# EAGLE board Adafruit Metro ESP32-S3 Rev A (EAGLE 9.6.2)
REV: A
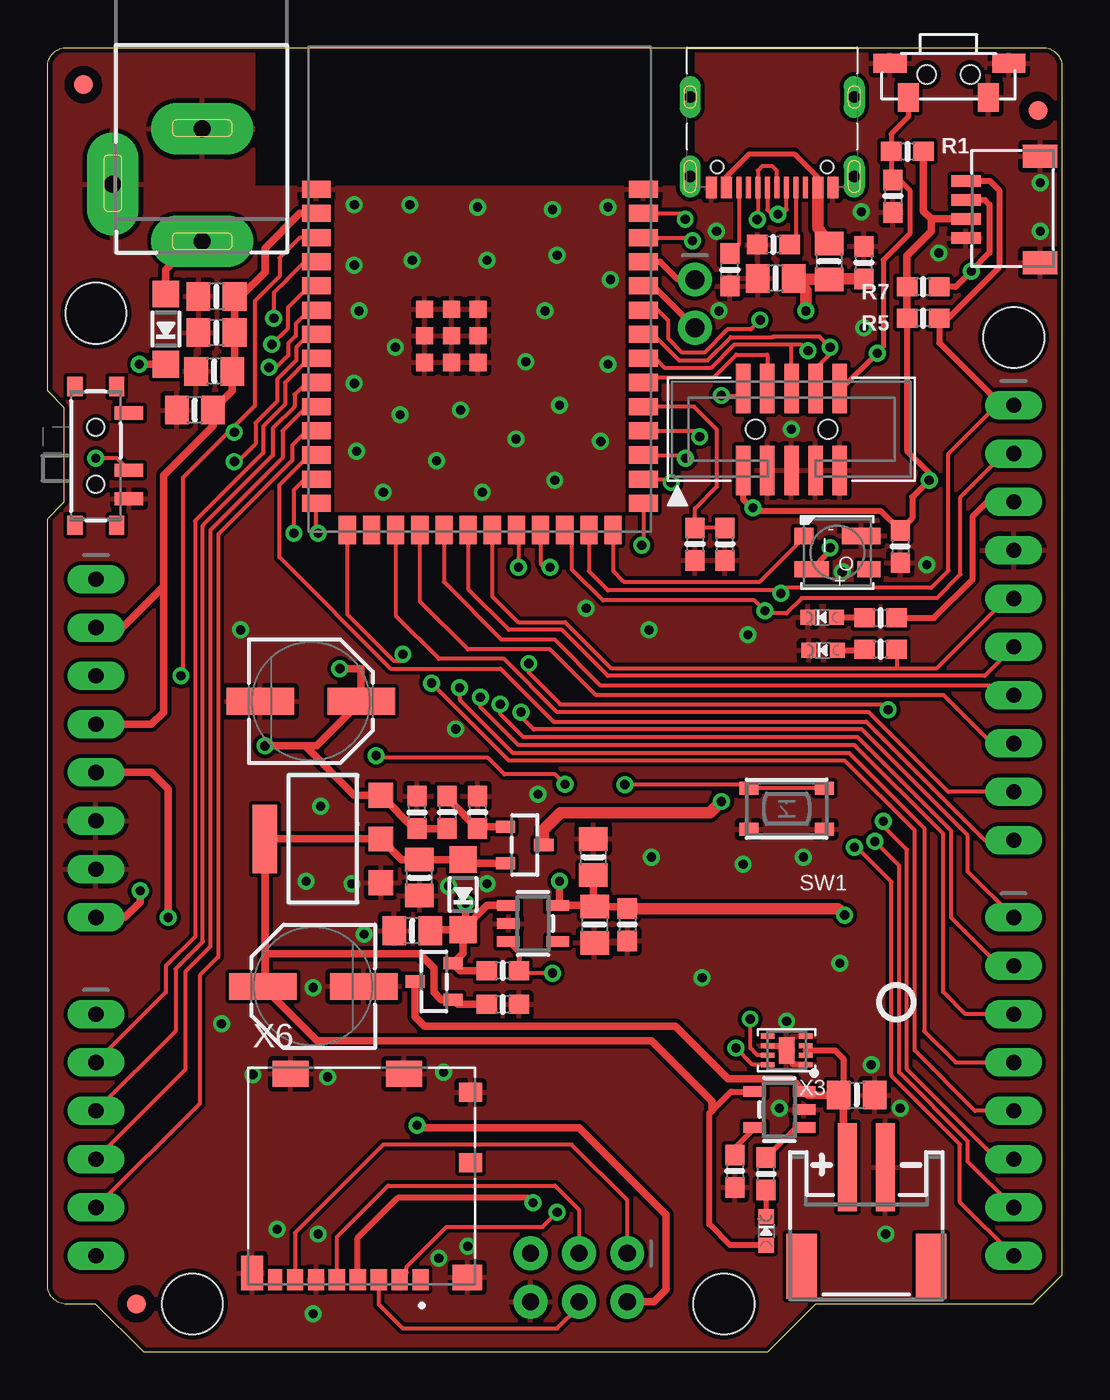
[diagram p0: board, top side]
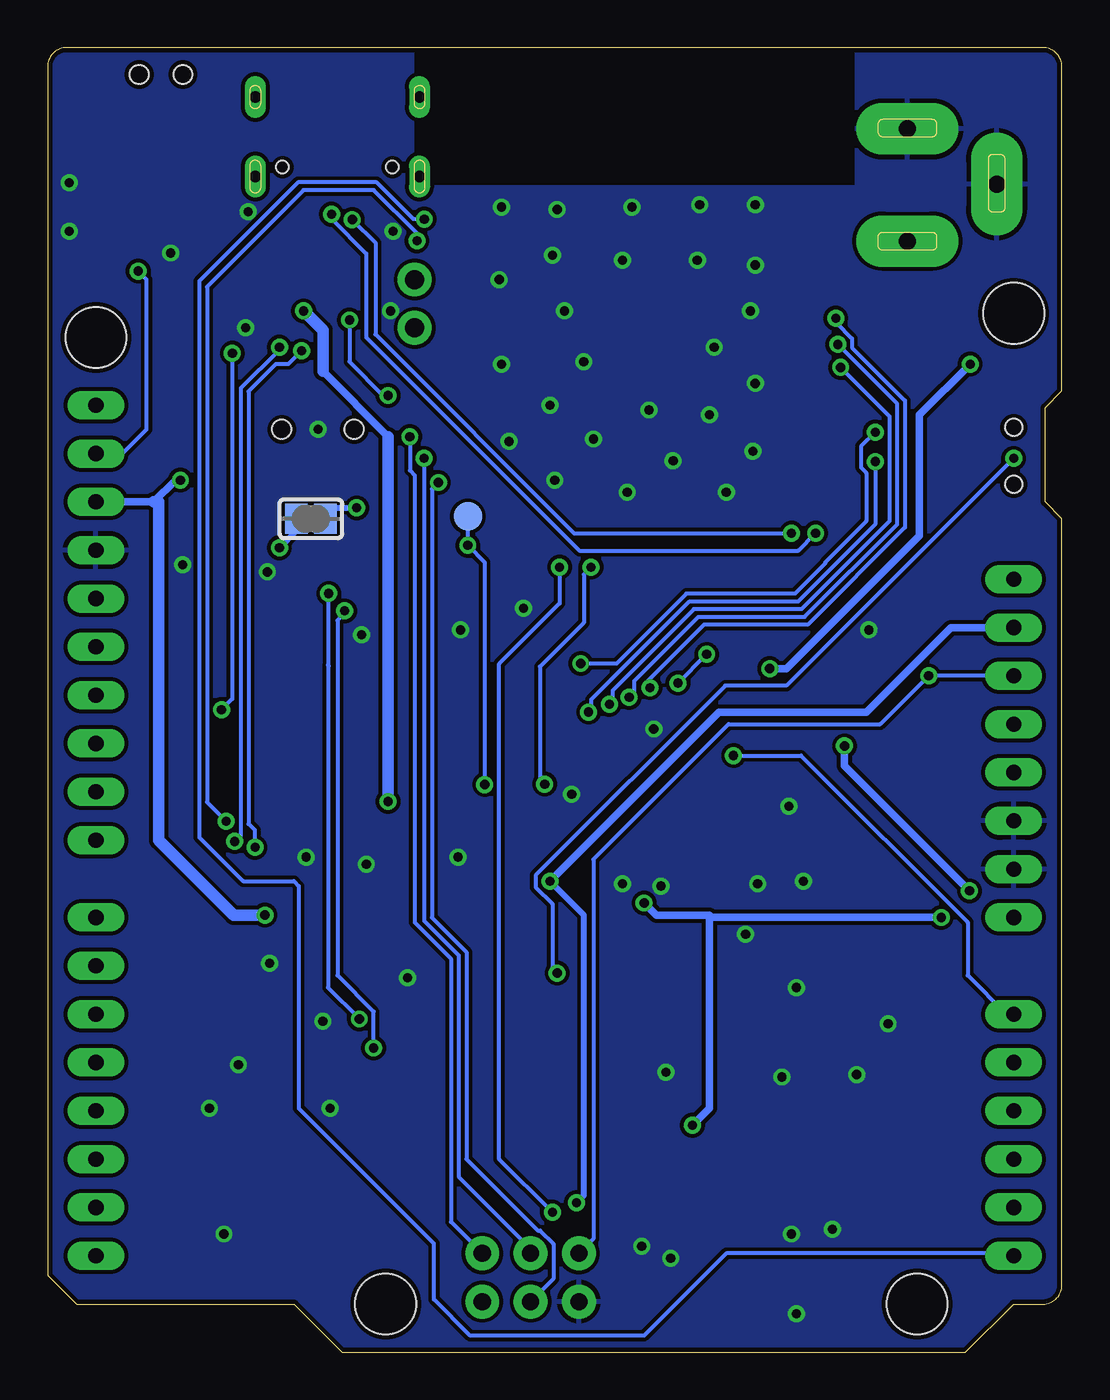
[diagram p1: board, bottom side, seen from below]

Size 53.34 x 68.58 mm. Coordinates in mm from the lower left corner, seen from the top.
Outline: 53.34,4.06 51.82,2.54 40.39,2.54 37.85,0 5.08,0 2.54,2.54 1,2.54 arc-90 0,3.54 0,43.81 0.89,44.7 0.89,49.66 0,50.55 0,67.58 arc-90 1,68.58 52.34,68.58 arc-90 53.34,67.58 53.34,4.06
Copper layers (1*16): Top 0.035mm / dielectric 1.5mm / Bottom 0.035mm
Design rules "adafruit *": minimum track width 8mil, minimum drill 15.5mil, track to track 8mil, track to pad 8mil, pad to pad 8mil, via to via 8mil, smd to smd 8mil, copper to edge 10mil, drill to drill 8mil, minimum pad ring 10mil, minimum via ring 8mil, stop-mask expansion 2mil, vias tented up to drill 20mil, thermal gap 10mil
Net classes: 2 lowpower: width 0.305 mm, drill 0.483 mm; 3 Power: width 0.305 mm, drill 0.483 mm
Holes 3.2 mm at 35.56,2.54 7.62,2.54 50.8,53.34 2.54,54.61

## Footprints (pad centres in the part's own frame; a part is rotated, then mirrored left to right if it is on the bottom)
1X06_OVALWAVE = drill 0.8 pad 1.5 long: 1 -6.35,0; 2 -3.81,0; 3 -1.27,0; 4 1.27,0; 5 3.81,0; 6 6.35,0
0805-NO = smd 1.24 x 1.5: 1 -0.95,0; 2 0.95,0
0603-NO = smd 1.075 x 1: 1 -0.85,0; 2 0.85,0
CHIPLED_0603_NOOUTLINE = smd 0.8 x 0.8: A 0,-0.75; C 0,0.75
JST_SH4 = smd 0.6 x 1.55: 1 -1.5,2.006; 2 -0.5,2.006; 3 0.5,2.006; 4 1.5,2.006 | smd 1.2 x 1.8: MT1 -2.8,-1.894; MT2 2.8,-1.894
SOD-123 = smd 1.4 x 1.4: A 1.85,0; C -1.85,0
FIDUCIAL_1MM = smd 1 x 1: 1 0,0
2X03_ROUND_70MIL = drill 0.9 pad 1.778: 1 -2.54,-1.27; 2 -2.54,1.27; 3 0,-1.27; 4 0,1.27; 5 2.54,-1.27; 6 2.54,1.27
1X10_OVALWAVE = drill 0.8 pad 1.5 long: 1 -11.43,0; 2 -8.89,0; 3 -6.35,0; 4 -3.81,0; 5 -1.27,0; 6 1.27,0; 7 3.81,0; 8 6.35,0; 9 8.89,0; 10 11.43,0
1X08_OVALWAVE = drill 0.8 pad 1.5 long: 1 -8.89,0; 2 -6.35,0; 3 -3.81,0; 4 -1.27,0; 5 1.27,0; 6 3.81,0; 7 6.35,0; 8 8.89,0
1X02_ROUND = drill 1 pad 1.778: 1 -1.27,0; 2 1.27,0
LED3535_FULLPADS = smd 1 x 0.85: 1 -1.75,0.875 | smd 1.8 x 0.85: 2 -1.35,-0.875 | smd 1.2 x 0.85: 3 1.65,-0.875 | smd 2 x 0.85: 4 1.25,0.875
PANASONIC_D = smd 3.556 x 1.4: + 2.654,0; - -2.654,0
SOT23-R = smd 0.635 x 1.016: 1 -0.95,-1; 2 0.95,-1; 3 0,1
SOLDERJUMPER_CLOSEDWIRE = smd 1.168 x 1.6: 1 -0.762,0; 2 0.762,0 | smd 0.635 x 0.203: WIRE 0,0
BTN_RKB2_4.6X2.8 = smd 1 x 0.7: A 1.973,1.075; A' -1.973,1.075; B 1.973,-1.075; B' -1.973,-1.075
SPST_TACTILE_RA = smd 1.1 x 1.5: 1 2.1,-0.9; 2 -2.1,-0.9 | smd 1.75 x 1: MT1 3.175,0.9; MT2 -3.075,0.9 | hole 1: 1.15,0.3; -1.15,0.3
SPDT_SMT_SSSS811101 = smd 0.7 x 1.5: A -2.25,1.242; B 0.75,1.242; C 2.25,1.242 | smd 1 x 0.8: SUP1 -3.65,0.592; SUP2 -3.65,-1.608; SUP3 3.65,0.592; SUP4 3.65,-1.608 | hole 0.9: -1.5,-0.508; 1.5,-0.508
TESTPOINT_ROUND_1.5MM_NO = smd 1.5 x 1.5: P$1 0,0
SOT223-R = smd 1.3 x 1.3: 1 -2.3,-3.05; 2 0,-3.05; 3 2.3,-3.05 | smd 3.6 x 1.3: 4 0,3.05
SOT23-5 = smd 0.55 x 1.2: 1 -0.95,-1.3; 2 0,-1.3; 3 0.95,-1.3; 4 0.95,1.3; 5 -0.95,1.3
S3-WROOM32 = smd 1.5 x 0.9: 1 -8.6,9.064; 2 -8.6,7.794; 3 -8.6,6.524; 4 -8.6,5.254; 5 -8.6,3.984; 6 -8.6,2.714; 7 -8.6,1.444; 8 -8.6,0.174; 9 -8.6,-1.096; 10 -8.6,-2.366; 11 -8.6,-3.636; 12 -8.6,-4.906; 13 -8.6,-6.176; 14 -8.6,-7.446; 27 8.6,-7.446; 28 8.6,-6.176; 29 8.6,-4.906; 30 8.6,-3.636; 31 8.6,-2.366; 32 8.6,-1.096; 33 8.6,0.174; 34 8.6,1.444; 35 8.6,2.714; 36 8.6,3.984; 37 8.6,5.254; 38 8.6,6.524; 39 8.6,7.794; 40 8.6,9.064 | smd 0.9 x 1.5: 15 -6.97,-8.836; 16 -5.7,-8.836; 17 -4.43,-8.836; 18 -3.16,-8.836; 19 -1.89,-8.836; 20 -0.62,-8.836; 21 0.65,-8.836; 22 1.92,-8.836; 23 3.19,-8.836; 24 4.46,-8.836; 25 5.73,-8.836; 26 7,-8.836 | smd 0.9 x 0.9: P$2 -2.9,2.76; P$3 -2.9,1.36; P$4 -2.9,-0.04; P$5 -1.5,-0.04; P$6 -1.5,1.36; P$7 -1.5,2.76; P$8 -0.1,2.76; P$9 -0.1,1.36; P$10 -0.1,-0.04
JSTPH2_BATT = smd 1 x 4.6: 1 -1,-2.303; 2 1,-2.303 | smd 1.6 x 3.4: NC1 -3.4,2.897; NC2 3.4,2.897
2X05_1.27MM_BOX_POSTS = smd 0.76 x 2.6: 1 -2.54,-2.15; 2 -2.54,2.15; 3 -1.27,-2.15; 4 -1.27,2.15; 5 0,-2.15; 6 0,2.15; 7 1.27,-2.15; 8 1.27,2.15; 9 2.54,-2.15; 10 2.54,2.15 | hole 1: -1.905,0; 1.905,0
TDFN8_2X2MM = smd 0.7 x 0.275: 1 -1,0.75; 2 -1,0.25; 3 -1,-0.25; 4 -1,-0.75; 5 1,-0.75; 6 1,-0.25; 7 1,0.25; 8 1,0.75 | smd 0.8 x 1.38: THERMAL 0,0
USB_C_CUSB31-CFM2AX-01-X = smd 0.575 x 1.15: A1B12 -3.2,2.275; A4B9 -2.4,2.275; B1A12 3.2,2.275; B4A9 2.4,2.275 | smd 0.275 x 1.15: A5 -1.25,2.275; A6 -0.25,2.275; A7 0.25,2.275; A8 1.25,2.275; B5 1.75,2.275; B6 0.75,2.275; B7 -0.75,2.275; B8 -1.75,2.275 | drill 0.6 pad 1 long: M1 -4.32,1.7; M2 4.32,1.7; M3 -4.32,-2.48; M4 4.32,-2.48 | hole 0.65: 2.89,1.2; -2.89,1.2
DCJACK_2MM_PTH = drill 0.9 pad 2.7 long: GND -2.9,2.54; GNDBREAK 0,-2.16; PWR 3,2.54
MOLEX_104031-0811 = smd 0.85 x 1.1: 1 3.105,-5.45; 2 2.005,-5.45; 3 0.905,-5.45; 4 -0.195,-5.45; 5 -1.295,-5.45; 6 -2.395,-5.45; 7 -3.495,-5.45 | smd 0.75 x 1.1: 8 -4.545,-5.45 | smd 1.2 x 1: 9 5.74,0.7; 10 5.74,4.4 | smd 1.55 x 1.35: G1 5.565,-5.325 | smd 1.17 x 1.8: G2 -5.755,-5.1 | smd 1.9 x 1.35: G3 -3.73,5.375; G4 2.24,5.375

## Placement (x,y rotation side)
AD  1x6 F  [1X06_OVALWAVE]  2.54,11.43 270 top
C1  10uF  [0805-NO]  38.29,56.45 180 top
C2  0.1uF  [0603-NO]  44.83,42.35 270 top
C3  10uF  [0805-NO]  19.56,24.96 90 top
C4  10uF  [0805-NO]  28.7,26.04 90 top
C5  1uF  [0603-NO]  30.48,22.48 270 top
C6  1uF  [0603-NO]  34.04,42.48 270 top
C7  10uF  [0805-NO]  8.89,55.5 180 top
C8  10uF  [0805-NO]  42.55,13.53 0 top
C10  10uF  [0805-NO]  8.89,53.59 180 top
C11  10uF  [0805-NO]  19.18,22.16 180 top
C12  0.1uF  [0603-NO]  19.43,28.38 90 top
C13  10uF  [0805-NO]  28.77,22.48 270 top
C14  1uF  [0603-NO]  44.45,60.77 270 top
C15  0.1uF  [0603-NO]  42.93,57.28 90 top
C17  10uF  [0805-NO]  8.76,51.56 180 top
C18  10uF  [0805-NO]  7.75,49.53 180 top
CHG1  ORANGE  [CHIPLED_0603_NOOUTLINE]  37.78,6.39 0 top
CONN1  STEMMA_I2C_QT  [JST_SH4]  50.29,60.07 90 top
D1  MBR540  [SOD-123]  6.22,53.78 90 top
D4  MBR540  [SOD-123]  21.84,24.07 90 top
F2  500mA  [0805-NO]  41.08,57.34 270 top
FD1  FIDUCIAL_1MM  [FIDUCIAL_1MM]  52.07,65.28 270 top
FD2  FIDUCIAL_1MM  [FIDUCIAL_1MM]  4.68,2.55 270 top
FD3  FIDUCIAL_1MM  [FIDUCIAL_1MM]  1.89,66.63 270 top
ICSP  3x2 M  [2X03_ROUND_70MIL]  27.94,3.94 180 top
IOH  1x10 F  [1X10_OVALWAVE]  50.8,38.35 270 top
IOL  1x8 F  [1X08_OVALWAVE]  50.8,13.97 270 top
JP2  UART  [1X02_ROUND]  34.04,55.12 270 top
L  RED  [CHIPLED_0603_NOOUTLINE]  40.78,36.91 90 top
LED1  WS2812B_3535FULL  [LED3535_FULLPADS]  41.53,42.04 0 top
ON  GREEN  [CHIPLED_0603_NOOUTLINE]  40.73,38.63 90 top
PC1  47uF/25V  [PANASONIC_D]  13.84,34.23 0 top
PC2  47uF/25V  [PANASONIC_D]  13.97,19.24 180 top
POWER  1x8 F  [1X08_OVALWAVE]  2.54,31.75 270 top
Q1  DMG3415U-7  [SOT23-R]  20.32,19.49 90 top
Q2  DMG3415U-7  [SOT23-R]  25.08,26.67 270 top
R1  10K  [0603-NO]  45.21,63.12 0 top
R2  10K  [0603-NO]  37.78,9.39 90 top
R3  5.1K  [0603-NO]  35.88,56.9 90 top
R4  2.2K  [0603-NO]  36.13,9.52 270 top
R5  10K  [0603-NO]  46.04,54.36 180 top
R6  10K  [0603-NO]  43.8,38.61 0 top
R7  10K  [0603-NO]  46.04,56.01 180 top
R8  5.1K  [0603-NO]  38.16,58.23 0 top
R9  10K  [0603-NO]  43.8,36.96 0 top
R12  100K  [0603-NO]  23.94,20.07 180 top
R14  100K  [0603-NO]  23.94,18.29 180 top
R15  100K  [0603-NO]  21.02,28.38 270 top
R16  100K  [0603-NO]  22.61,28.38 270 top
R17  1Meg  [0603-NO]  35.62,42.48 90 top
SJ1  [SOLDERJUMPER_CLOSEDWIRE]  39.5,43.81 0 bottom
SW1  RKB2  [BTN_RKB2_4.6X2.8]  38.86,28.58 180 top
SW3  RA_TACT  [SPST_TACTILE_RA]  47.37,66.87 0 top
SW4  SPDT R/A  [SPDT_SMT_SSSS811101]  3.05,47.12 270 top
TP1  [TESTPOINT_ROUND_1.5MM_NO]  31.24,43.94 0 bottom
U1  NCP1117ST50T3G  [SOT223-R]  14.48,26.99 90 top
U2  MCP73831T-2ACI/OT  [SOT23-5]  38.48,12.76 90 top
U4  AP2112(3.3V)  [SOT23-5]  25.53,22.54 270 top
U5  ESP32-S3-WROOM  [S3-WROOM32]  22.73,52.07 0 top
U$15  [PCBFEAT-REV-040]  44.64,18.42 0 top
U$52  [METROS3_TOP]  0,-0.13 0 top
U$58  [METROS3_BOT]  53.34,-0.13 0 bottom
X1  JSTPH  [JSTPH2_BATT]  43.05,7.43 180 top
X2  2x5 0.05in  [2X05_1.27MM_BOX_POSTS]  39.12,48.51 0 top
X3  MAX17048/T  [TDFN8_2X2MM]  38.86,15.87 180 top
X4  USB C  [USB_C_CUSB31-CFM2AX-01-X]  38.1,63.5 180 top
X5  2.1mm  [DCJACK_2MM_PTH]  5.59,61.4 270 top
X6  MicroSD  [MOLEX_104031-0811]  16.51,9.27 0 top

## Library data of the parts
AD ICSP IOH IOL POWER = microbuilder; FORCETHM: 1
C1-C8 C10-C15 C17 C18 D1 D4 F2 JP2 LED1 R1-R9 R12 R14-R17 SJ1 TP1 U$15 = microbuilder
CHG1 L ON Q1 Q2 U1 = microbuilder; ROT: 270
CONN1 = adafruit_electromech; LCSC: C2845363
FD1-FD3 = microbuilder; BOM: EXCLUDE
PC1 PC2 = microbuilder; ROT: 180
SW1 SW4 X2 X6 = adafruit_electromech
SW3 = adafruit_electromech; LCSC: C778159
U2 = microbuilder; JLC_ROTATION: 0; LCSC: C424093
U4 = adafruit_power; JLC_ROTATION: 0
U5 = adafruit_wireless
U$52 U$58 = metro_silks
X1 = adafruit_electromech; LCSC: C47647
X3 = adafruit_sensor; ROT: 270
X4 = adafruit_electromech; LCSC: C165948
X5 = adafruit_electromech; FORCETHM: 1

## Nets
3.3V [Power]: C2.1 C4.1 C5.1 C7.1 C10.1 C13.1 C17.1 C18.1 CONN1.2 IOH.3 POWER.2 POWER.4 R1.2 R5.2 R6.2 R7.2 SJ1.2 U4.5 U5.2 X2.1 X6.4
+5V [Power]: C3.2 CHG1.A D4.A PC2.+ Q1.1 Q2.2 R14.2 U1.2 U1.4 U2.4
AD0: AD.1 U5.22
AD1: AD.2 U5.8
AD2: AD.3 U5.9
AD3: AD.4 U5.10
AD4: AD.5 U5.11
AD5: AD.6 U5.39
BOOT0: SW1.B SW1.B' TP1.P$1 U5.27
D2: IOL.6 U5.38
D3: IOL.5 U5.15
D4: IOL.4 U5.4
D5: IOL.3 U5.5
D6: IOL.2 U5.6
D7: IOL.1 U5.7
D8: IOH.10 U5.12
D9: IOH.9 U5.17
D10: IOH.8 U5.18
D11: IOH.7 U5.19
D12: IOH.6 U5.20
D13: IOH.5 R9.2 U5.21
D+: U5.14 X4.A6 X4.B6
D-: U5.13 X4.A7 X4.B7
EN: R12.1 SW4.B U4.3
GND [lowpower]: C1.2 C2.2 C3.1 C4.2 C5.2 C6.2 C7.2 C8.2 C10.2 C11.2 C12.2 C13.2 C14.2 C15.2 C17.2 C18.2 CONN1.1 CONN1.MT1 CONN1.MT2 ICSP.6 IOH.4 L.C LED1.4 ON.C PC1.- PC2.- POWER.6 POWER.7 R3.1 R4.2 R8.1 R14.1 R16.1 R17.1 SW1.A SW1.A' SW3.1 SW3.MT1 SW3.MT2 SW4.C U1.1 U2.2 U4.2 U5.1 U5.40 U5.P$2 U5.P$3 U5.P$4 U5.P$5 U5.P$6 U5.P$7 U5.P$8 U5.P$9 U5.P$10 X1.1 X2.3 X2.5 X2.7 X2.9 X3.1 X3.4 X3.6 X3.THERMAL X4.A1B12 X4.B1A12 X5.GND X5.GNDBREAK X6.6 X6.10 X6.G1 X6.G2 X6.G3 X6.G4
IO38_DBLTAP: C6.1 R17.2 U5.31
MISO: ICSP.1 U5.30 X6.7
MOSI: ICSP.4 U5.28 X6.3
N$1: L.A R9.1
N$2: Q2.1 R15.1 R16.2
N$3: ON.A R6.1
N$4: CHG1.C R2.1
N$5 [Power]: LED1.2 SJ1.1
N$6: R2.2 U2.1
N$7: R8.2 X4.A5
N$8: R3.2 X4.B5
N$9: R4.1 U2.5
N$13: F2.1 X4.A4B9 X4.B4A9
NEOPIX: LED1.1 U5.26
PWR: D1.A X5.PWR
RESET: C14.1 ICSP.5 POWER.3 R1.1 SW3.2 U5.3 X2.10
RXD0: JP2.2 U5.36
SCK: ICSP.3 U5.29 X6.5
SCL: CONN1.4 IOH.1 R5.1 U5.25 X3.7
SD_CS: U5.23 X6.2
SDA: CONN1.3 IOH.2 R7.1 U5.24 X3.8
TCK: U5.32 X2.4
TDI_RX: IOL.7 U5.34 X2.8
TDO_TX: IOL.8 U5.33 X2.6
TMS: U5.35 X2.2
TXD0: JP2.1 U5.37
VBAT [Power]: C8.1 Q1.3 U2.3 X1.2 X3.2 X3.3
VBUS: C1.1 C15.1 F2.2 Q2.3
VHIGH [Power]: C11.1 D4.C ICSP.2 POWER.5 Q1.2 R12.2 U4.1
VIN [USB]: C12.1 D1.C PC1.+ POWER.8 R15.2 U1.3

## Tracks (layer width: path | path; a pad name or v marks a point on that pad's centre or on a via)
3.3V  (via drill 0.48)
  Top 0.305: X6.4 16.32,6.03 18.41,8.13 25.27,8.13 v25.53,7.87 | X2.1 36.58,44.83 37.02,44.39 v37.08,44.39 37.14,44.39 37.31,44.22 43.81,44.22 C2.1 45.47,43.84 45.47,44.96 v46.35,45.85 46.35,46.23 45.19,47.4 R5.2 | R6.2 46.61,38.61 48.64,40.64 48.64,43.94 49.4,44.7 IOH.3
  Top 0.406: U5.2 13.26,59.86 11.43,58.04 11.43,56.77 10.16,55.5 C7.1 C10.1 9.84,51.69 C17.1 9.71,50.55 C18.1 8.7,48.7 6.1,46.1 6.1,40.26 | 28.7,23.49 U4.5 26.92,23.59 v26.92,24.77 | 28.7,23.49 C13.1 30.38,23.43 C5.1 | 28.7,23.49 C4.1 | POWER.2 3.94,38.1 6.1,40.26 | CONN1.2 46.47,59.57 | R1.2 46.06,59.98 46.47,59.57 | 46.47,59.57 46.47,58.92 45.19,57.63 R7.2 R5.2 | 6.1,40.26 6.1,33.65 5.46,33.02 POWER.4
  Top 0.61: v41.91,22.99 41.57,23.33 C5.1
  Bottom 0.305: v25.53,7.87 25.15,8.25 25.15,22.99 v26.92,24.77 | SJ1.2 38.16,44.39 v37.08,44.39
  Bottom 0.406: POWER.2 5.84,38.1 10.29,33.65 18.03,33.65 v26.92,24.77 | IOH.3 47.75,44.7 46.61,45.85 v46.35,45.85
  Bottom 0.61: v41.91,22.99 43.56,22.99 47.5,26.92 47.5,44.7 47.75,44.7
+5V
  Top 0.305: CHG1.A 35.89,5.64 34.8,6.73 34.8,12.57 34.92,12.7 35.94,13.71 U2.4
  Top 0.406: Q2.2 22.04,25.72 D4.A C3.2 18.61,25.91 U1.2 U1.4 11.43,20.96 | 11.43,20.96 11.43,19.35 PC2.+ 14.17,16.38 31.75,16.38 34.92,13.21 34.92,12.7 | R14.2 21.58,18.29 Q1.1 20.7,18.55 20.32,18.92 20.32,20.19 19.56,20.96 11.43,20.96
AD0  (via drill 0.48)
  Top 0.203: U5.22 24.77,43.12 v24.77,41.27 | v27.2,29.87 26.69,30.38 24.02,30.38 23.16,31.24 17.4,31.24 v17.27,31.37
  Bottom 0.203: v24.77,41.27 25.15,40.89 25.15,38.35 27.45,36.05 27.45,30.12 v27.2,29.87 | v17.27,31.37 13.72,31.37 4.95,22.61 4.95,19.81 2.92,17.78 AD.1
AD1
  Top 0.203: U5.8 13.75,52.24 12.48,50.97 12.48,49.83 11.34,48.69 11.34,47.28 7.76,43.7 7.76,21.86 6.22,20.32 6.22,18.92 AD.2
AD2
  Top 0.203: AD.3 6.73,16.89 6.73,20.16 8.17,21.59 8.17,43.47 11.85,47.15 11.85,48.56 12.99,49.7 12.99,50.34 13.62,50.97 U5.9
AD3
  Top 0.203: AD.4 7.24,14.86 7.24,20 8.57,21.34 8.57,43.23 12.36,47.02 12.36,48.43 13.62,49.7 U5.10
AD4
  Top 0.203: U5.11 13.62,48.43 12.86,47.67 12.86,46.89 8.98,43.01 8.98,20.79 8,19.81 8,13.08 AD.5
AD5  (via drill 0.48)
  Top 0.203: U5.39 33.23,59.86 v33.53,59.56
  Bottom 0.203: AD.6 2.67,5.21 17.65,5.21 21.97,0.89 31.11,0.89 33.02,2.79 33.02,5.71 40.13,12.83 40.13,24.51 40.39,24.77 43.05,24.77 45.36,27.08 45.36,56.3 40.17,61.49 36.03,61.49 34.1,59.56 v33.53,59.56
BOOT0  (via drill 0.48)
  Top 0.203: U5.27 31.33,42.51 v31.24,42.42 | SW1.B' SW1.B 36.89,29.85 v30.35,29.85
  Bottom 0.203: TP1.P$1 v31.24,42.42 30.35,41.53 v30.35,29.85
D2  (via drill 0.48)
  Top 0.203: IOL.6 49.91,10.16 45.19,14.88 45.19,26.43 43.95,27.66 v43.95,27.92 | v33.92,58.43 33.79,58.55 31.37,58.55 U5.38
  Bottom 0.203: v33.92,58.43 33.92,58.81 36.2,61.09 39.88,61.09 44.96,56.01 44.96,28.92 v43.95,27.92
D3  (via drill 0.48)
  Top 0.203: U5.15 15.76,38.79 18.2,36.35 18.68,36.35 v18.68,36.69 | IOL.5 48.77,12.7 45.59,15.87 45.59,27.43 41.92,31.11 24.26,31.11 v20.19,35.18
  Bottom 0.203: v20.19,35.18 v18.68,36.69 | v18.68,36.69
D4  (via drill 0.48)
  Top 0.203: U5.4 13.51,57.32 12.6,56.41 12.6,56.39 11.9,55.69 v11.9,54.36 | v21.67,34.94 21.67,34.3 24.45,31.52 42.14,31.52 46.1,27.55 46.1,16.89 47.75,15.24 IOL.4
  Bottom 0.203: v11.9,54.36 11.9,54.14 11.04,53.29 11.04,52.8 8.26,50.02 8.26,43.36 13.36,38.25 18.82,38.25 21.9,35.17 v21.67,34.94
D5  (via drill 0.48)
  Top 0.203: v11.79,52.98 12.65,53.83 12.65,54.93 13.77,56.05 U5.5 | IOL.3 48.26,17.78 47.09,18.95 47.09,27.26 42.43,31.92 24.76,31.92 22.76,33.92 v22.76,34.43
  Bottom 0.203: v11.79,52.98 8.66,49.85 8.66,43.53 13.53,38.66 19.13,38.66 22.5,35.28 22.5,34.68 v22.76,34.43
D6  (via drill 0.48)
  Top 0.203: v11.64,51.77 12.02,51.77 12.66,52.4 12.66,53.04 13.05,53.43 13.05,54.06 13.77,54.78 U5.6 | IOL.2 50.04,20.32 47.5,22.86 47.5,27.43 42.6,32.33 25.03,32.33 23.8,33.56 v23.8,34.07
  Bottom 0.203: v11.64,51.77 9.07,49.2 9.07,43.69 13.7,39.06 19.36,39.06 23.64,34.78 23.64,34.23 v23.8,34.07
D7  (via drill 0.48)
  Top 0.203: U5.7 13.77,53.51 13.08,52.82 13.08,52.14 12.08,51.14 12.08,50 10.93,48.86 10.93,47.75 10,46.82 v9.82,46.82 | IOL.1 48.39,25.27 48.39,27.18 42.82,32.74 25.55,32.74 24.89,33.4 v24.89,33.65
  Bottom 0.203: v9.82,46.82 9.82,43.52 13.87,39.47 19.58,39.47 24.77,34.29 24.77,33.78 v24.89,33.65
D8
  Top 0.203: U5.12 13.76,47.16 12.19,45.59 12.19,41.78 18.03,35.94 23.82,35.94 26.61,33.15 43.05,33.15 49.28,26.92 IOH.10
D9
  Top 0.203: U5.17 18.3,38.72 20.57,36.45 24,36.45 26.8,33.65 43.18,33.65 47.37,29.46 IOH.9
D10
  Top 0.203: U5.18 19.57,39.48 22.1,36.96 26.42,36.96 28.83,34.54 47.12,34.54 49.66,32 IOH.8
D11
  Top 0.203: U5.19 20.84,40.5 23.88,37.46 26.67,37.46 29.08,35.05 50.29,35.05 IOH.7
D12
  Top 0.203: U5.20 22.11,40.12 24.26,37.97 27.05,37.97 29.46,35.56 49.28,35.56 IOH.6
D13
  Top 0.203: U5.21 23.38,39.74 24.74,38.38 27.22,38.38 29.63,35.97 44.7,35.97 | IOH.5 50.42,39.62 46.76,35.97 44.7,35.97 | R9.2 44.65,36.02 44.7,35.97
D+  (via drill 0.48)
  Top 0.203: X4.A6 38.35,62.11 38.1,62.36 37.59,62.36 37.35,62.11 X4.B6 37.35,59.57 v37.32,59.54 | v14.22,43.05 14.13,43.14 U5.14
  Bottom 0.203: v37.32,59.54 36.1,58.33 36.1,53.5 25.65,43.05 v14.22,43.05
D-  (via drill 0.48)
  Top 0.203: X4.A7 37.85,60.07 38.1,59.82 v38.41,59.82 38.61,59.82 38.86,60.07 38.86,61.21 X4.B7 | v12.95,43.05 12.95,45.34 13.51,45.89 U5.13
  Bottom 0.203: v38.41,59.82 38.41,59.57 36.58,57.74 36.58,53.34 25.38,42.14 13.87,42.14 v12.95,43.05
EN  (via drill 0.48)
  Top 0.203: SW4.B 3.67,46.99 v2.54,46.99 | v26.54,19.94 24.92,19.94 R12.1
  Top 0.254: U4.3 24.79,21.03 R12.1
  Bottom 0.203: v2.54,46.99 14.49,35.04 17.71,35.04 27.67,25.08 27.67,24.46 26.8,23.58 26.8,20.19 v26.54,19.94
GND  (via drill 0.48)
  Top 0.305: X3.6 38.61,16.12 X3.THERMAL 38.86,15.49 39.23,15.12 X3.1
  other vias: 36.83,37.72 46.23,41.4 41.78,41.02 39.12,48.51 42.93,53.85 35.31,54.74 35.18,58.93 42.8,59.94 46.86,57.78 52.2,58.93 52.2,61.47 29.46,60.2 26.54,60.07 22.61,60.2 19.05,60.32 16.13,60.32 16.13,57.15 19.18,57.4 23.11,57.4 26.8,57.66 29.59,56.39 26.16,54.74 29.46,51.94 25.15,52.07 26.92,49.78 29.08,47.88 26.67,45.85 22.86,45.21 24.64,48.01 21.72,49.53 20.45,46.86 17.65,45.21 16.26,47.37 18.54,49.28 16.13,50.93 18.29,52.83 16.38,54.74 44.07,6.22 38.48,12.83 38.86,17.4 43.31,15.11 44.83,12.83 22.1,5.59 20.57,4.95 12.06,6.48 14.22,6.22 13.97,2.03 14.73,14.48 10.79,14.6 20.83,14.73 13.97,19.18 16.64,21.97 16,24.64 23.11,24.64 21.08,24.51 36.58,25.65 39.75,26.04 31.75,26.04 34.42,19.69 41.66,20.45 31.62,37.97 28.32,39.12 25.78,29.34 21.46,32.77 14.35,28.7 13.59,24.77 9.14,17.27 10.16,37.97
  pour Top (rank 3): 53.34,68.45 53.34,-0.13 0,-0.13 0,68.45 10.79,68.58 10.79,61.21 34.16,61.21 34.16,68.58
  pour Bottom (rank 3): 53.34,68.45 53.34,-0.13 0,-0.13 0,68.58 10.79,68.58 10.79,61.21 34.16,61.21 34.16,68.58
IO38_DBLTAP
  Top 0.203: R17.2 C6.1 34.04,44.35 35.18,45.49 35.18,48.51 33.99,49.7 U5.31
MISO  (via drill 0.48)
  Top 0.203: ICSP.1 30.48,8 27.56,10.92 17.65,10.92 13.02,6.28 X6.7 | U5.30 33.99,48.43 v34.29,48.13
  Bottom 0.203: v34.29,48.13 34.29,46.35 34.04,46.1 34.04,22.61 32.13,20.7 32.13,6.86 ICSP.1
MOSI  (via drill 0.48)
  Top 0.203: X6.3 17.41,2.52 18.67,1.27 26.8,1.27 27.94,2.41 ICSP.4 | U5.28 32.62,45.89 v32.79,45.72
  Bottom 0.203: v32.79,45.72 33.13,45.38 33.13,22.85 31.32,21.04 31.32,10.16 27.56,6.4 27.45,6.4 26.75,5.7 26.75,3.86 ICSP.4
N$1
  Top 0.305: L.A 42.9,36.91 R9.1
N$2
  Top 0.406: Q2.1 22.69,27.62 R16.2 21.93,28.22 21.93,28.24 21.02,29.15 R15.1
N$3
  Top 0.305: R6.1 41.5,38.61 ON.A
N$4
  Top 0.254: R2.1 CHG1.C
N$5  (via drill 0.48)
  Top 0.305: LED1.2 41.15,42.13 v41.15,42.29
  Bottom 0.305: v41.15,42.29 40.26,43.18 SJ1.1
N$6
  Top 0.254: R2.2 39.36,11.81 U2.1
N$7
  Top 0.203: X4.A5 39.35,58.57 R8.2
N$8
  Top 0.203: X4.B5 36.35,58.22 R3.2
N$9
  Top 0.254: R4.1 36.13,10.76 U2.5
N$13
  Top 0.254: X4.B4A9 35.7,61.79 36.9,62.99 39.26,62.99 40.5,61.75 X4.A4B9
  Top 0.61: X4.A4B9 40.5,59.12 F2.1
NEOPIX
  Top 0.203: U5.26 29.73,41.07 30.3,40.51 37.47,40.51 39.78,42.83 LED1.1
PWR
  Top 0.406: D1.A 6.22,56.9 7.72,58.4 X5.PWR
RESET  (via drill 0.48)
  Top 0.203: U5.3 13.26,58.59 12.19,57.53 12.19,56.56 10.89,55.26 10.89,49.75 9.72,48.58 | v7.01,35.56 7.11,35.66 7.11,45.97 9.72,48.58 | 9.72,48.58 9.82,48.47 v9.82,48.37 | 43.94,52.83 v43.62,52.52 | v25.3,36.21 25.3,35.72 26.96,34.06 43.81,34.06 44.09,33.78 v44.2,33.78
  Top 0.254: SW3.2 45.27,64.96 44.36,64.05 R1.1 44.36,61.71 C14.1 44.81,61.62 45.34,61.09 45.34,58.8 43.94,57.4 43.94,52.83 | X2.10 41.77,50.66 v43.62,52.52
  Bottom 0.203: POWER.3 v7.01,35.56 9.55,33.02 17.53,33.02 24.64,25.91 24.64,5.97 ICSP.5 | v9.82,48.37 10.57,47.62 10.57,46.51 10.29,46.23 10.29,43.69 12.45,41.53 12.45,41.47 14.04,39.88 19.75,39.88 23.42,36.21 v25.3,36.21 | v43.62,52.52 43.62,34.35 v44.2,33.78
RXD0
  Top 0.305: U5.36 31.83,56.05 JP2.2
SCK  (via drill 0.48)
  Top 0.203: X6.5 15.21,6.07 17.91,8.76 26.67,8.76 27.94,7.49 ICSP.3 | U5.29 33.37,47.16 v33.54,46.99
  Bottom 0.203: v33.54,46.99 33.54,22.69 31.73,20.87 31.73,9.25 27.94,5.46 ICSP.3
SCL  (via drill 0.48)
  Top 0.203: U5.25 28.46,41.06 29.46,40.06 38.39,40.06 v38.56,39.89 38.85,40.18 46.47,40.18 47.37,41.09 47.37,47.24 49.91,49.78 IOH.1 | X3.7 37.32,15.62 36.94,16 v36.94,17.53
  Top 0.305: CONN1.4 49.55,61.57 50.04,61.09 50.04,57.02 47.37,54.36 R5.1 46.89,53.06 50.16,49.78 IOH.1
  Bottom 0.203: v36.94,17.53 38.59,19.18 38.59,36.12 38.56,36.08 v38.56,39.89
SD_CS  (via drill 0.48)
  Top 0.203: U5.23 25.92,41.46 26.1,41.27 v26.42,41.27 | X6.2 18.89,4.19 18.89,4.5 20.99,6.6 26.04,6.6 v26.8,7.37
  Bottom 0.203: v26.42,41.27 26.42,39.37 29.59,36.2 29.59,10.16 v26.8,7.37
SDA  (via drill 0.48)
  Top 0.203: IOH.2 50.29,47.24 48.01,44.96 48.01,40.89 46.76,39.65 39.66,39.65 38.86,38.85 37.85,38.85 v37.72,38.98 37.17,39.52 29.21,39.52 27.56,41.17 27.56,42.87 U5.24 | X3.8 37.07,15.12 v36.2,16
  Top 0.305: CONN1.3 49.28,60.57 49.53,60.32 49.53,57.78 v48.58,56.83 47.75,56.01 R7.1
  Bottom 0.203: IOH.2 49.4,47.24 48.13,48.51 48.13,56.39 v48.58,56.83 | v37.72,38.98 37.72,38.85 38.1,38.47 38.1,19.81 36.2,17.91 v36.2,16
TCK
  Top 0.203: U5.32 31.59,51.23 35,51.23 36.22,52.45 37.85,52.45 X2.4
TDI_RX  (via drill 0.48)
  Top 0.203: IOL.7 48.39,10.03 48.39,11.11 44.78,14.72 44.78,25.57 v43.49,26.86 | U5.34 31.83,53.51 33.2,52.14 34.7,52.14 35.93,53.36 38.13,53.36 38.16,53.39 40.59,53.39 v41.15,52.83 41.15,52.45 40.39,51.69 X2.8
  Bottom 0.203: v41.15,52.83 41.15,52.7 43.18,50.67 43.18,27.17 v43.49,26.86
TDO_TX  (via drill 0.48)
  Top 0.203: U5.33 31.97,52.24 32.48,51.74 34.87,51.74 36.1,52.96 39.12,52.96 | IOL.8 47.98,7.9 47.98,10.94 44.37,14.55 44.37,24.73 42.56,26.54 v42.43,26.54 | v39.99,52.64 39.67,52.96 39.12,52.96 | X2.6 39.12,52.96
  Bottom 0.203: v42.43,26.54 42.43,27.43 42.77,27.78 42.77,50.5 41.32,51.96 40.67,51.96 v39.99,52.64
TMS  (via drill 0.48)
  Top 0.203: U5.35 32.08,54.78 32.64,54.23 32.64,53.28 33.37,52.55 34.54,52.55 35.76,53.77 36.97,53.77 v37.47,54.26 | v35.43,50.29 36.58,50.29 X2.2
  Bottom 0.203: v37.47,54.26 37.47,52.07 35.69,50.29 v35.43,50.29
TXD0
  Top 0.305: U5.37 32.21,57.32 33.15,56.39 JP2.1
VBAT
  Top 0.254: X3.3 39.86,15.87 X3.2
  Top 0.305: 39.86,15.87 41.4,15.87 41.85,15.43 41.85,13.33
  Top 0.406: X1.2 41.85,9.94 41.85,13.33 41.66,13.52 C8.1 39.97,13.52 U2.3 39.1,14.39 35.77,14.39 33.02,17.14 19.81,17.14 19.32,17.64 Q1.3
VBUS  (via drill 0.48)
  Top 0.406: F2.2 41.12,56.43 | 39.3,56.39 C1.1
  Top 0.61: C15.1 41.12,56.43 | F2.2 39.3,56.39 | C1.1 39.88,55.81 v39.88,54.74 | Q2.3 26.08,27.48 26.96,28.36 34.84,28.36 v35.43,28.96
  Bottom 0.406: 38.86,51.56 35.43,48.13
  Bottom 0.61: v39.88,54.74 38.86,53.72 38.86,51.56 | 35.43,48.13 v35.43,28.96
VHIGH  (via drill 0.48)
  Top 0.406: C11.1 20.18,22.22 21.59,22.22 | 21.59,22.22 D4.C | U4.1 23.12,23.49 D4.C | D4.C 21.84,20.97 Q1.2 21.7,20.07 R12.2 | POWER.5 5.46,30.48 6.35,29.59 v6.35,22.86 | v21.97,23.62 21.97,22.6 21.59,22.22 | ICSP.2 31.88,2.67 32.51,3.3 32.51,7.24 27.94,11.81 19.43,11.81 v19.43,11.94
  Bottom 0.406: v6.35,22.86 18.54,22.86 | v21.97,23.62 21.34,22.99 18.54,22.99 18.54,22.86 | v19.43,11.94 18.54,12.83 18.54,22.86
VIN  (via drill 0.48)
  Top 0.406: R15.2 C12.1 19.28,27.54 U1.3 16.13,29.29 13.54,31.88 v11.43,31.88 14.15,31.88 PC1.+ 16.5,35.94 v15.37,35.94 | POWER.8 4.06,22.86 4.86,23.66 v4.86,24.26 | D1.C v4.83,51.93 v4.83,51.94
  Bottom 0.406: v11.43,31.88 11.43,30.83 v4.86,24.26 | v4.83,51.94 7.49,49.28 7.49,42.93 14.48,35.94 v15.37,35.94

## Text on the board
214bmp: D:/SmartProjects/Snc/a4_bn_logo2.bmp